# Altium PCB PCB1.PcbDoc
Units mm, origin at the board's own origin, x right, y up, seen from the top; angles counter-clockwise.
Board outline 152.4 x 101.6 mm, 2 copper layers (Top Layer, Bottom Layer); 22 components, 41 nets, 135 pads, 0 vias.
Unrouted connection lines stored in the file: 76.
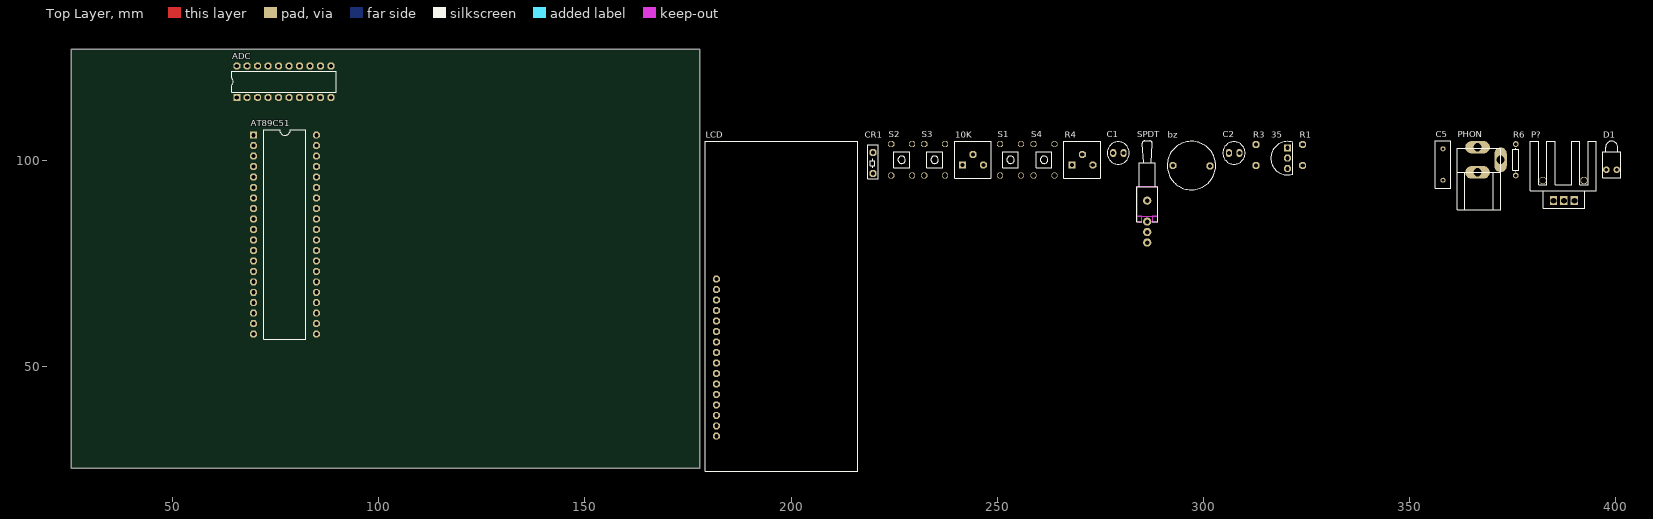
[diagram p0: Top Layer view]
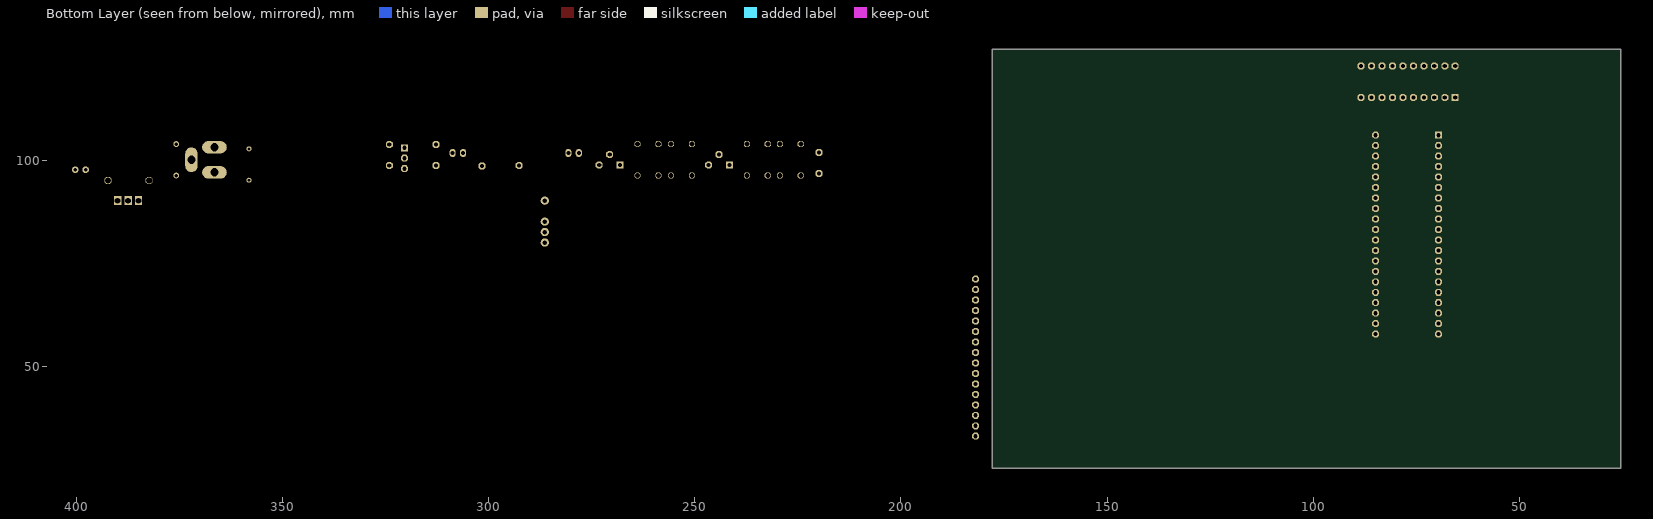
[diagram p1: Bottom Layer view, seen from below]

## Layer stack, top to bottom
Top Layer: signal copper 0.0356
Dielectric: dielectric 0.32, FR-4, Dk 4.8
Bottom Layer: signal copper 0.0356

## Board outline
25.4,25.4 177.8,25.4 177.8,127 25.4,127

## Design rules (kind name [scope] priority, off if disabled: settings)
Clearance [All] p1: gap=0.254
PolygonConnect [All] p1: connectstyle=Relief reliefconductorwidth=0.254 reliefentries=4 polygonreliefangle="90 Angle"
RoutingVias [All] p1: holewidth=0.711 width=1.27 viastyle="Through Hole" minholewidth=0.711 minwidth=1.27 maxholewidth=0.711 maxwidth=1.27
SilkscreenOverComponentPads [All] p1: minsilkscreentomaskgap=0.254
SolderMaskExpansion [All] p1: expansion=0.102
Width [All] p1: maxlimit=1 minlimit=1 preferedwidth=1
27 further rules are at their usual default settings.

## Components (designator, comment, footprint, x,y, rotation, side; value= is the part's Value field where it differs from the comment)
10K "R5" reg-variable 244.094,101.473 r0 top
35 "LM35- TEMP. SENSOR" "LM35_TEMP SENSOR" 320.421,103.124 r0 top
ADC "dip-20pin" dip-20pin 65.532,115.316 r90 top
AT89C51 "AT89S52" AT89S52 69.596,106.172 r0 top
bz "buzzer" buzzer 292.608,98.806 r0 top
C1 "Cap" CAP 278.13,101.854 r0 top
C2 "Cap" CAP 306.197,101.854 r0 top
C5 "Cap" RAD-0.3 358.14,99.06 r90 top
CR1 "XTAL-LARGE" XTAL-LARGE 219.837,96.901 r90 top
D1 "LED1" LED-1 399.034,97.79 r90 top
LCD "LCD-16X2" LCD-16x2 181.864,33.147 r90 top
P? "Voltage Regulator" "7805 WITH HEAT-SINK" 384.937,90.297 r0 top
PHON "PHONE JACK" "PHONE JACK" 361.569,88.011 r90 top
R1 "10K" "res- 2.54x3" 324.104,98.806 r90 top
R3 "10K" "res- 2.54x3" 312.801,98.806 r90 top
R4 "10K" reg-variable 270.637,101.473 r0 top
R6 "Res1" AXIAL-0.3 375.793,100.203 r90 top
S1 "SW-PB" sw-pb 250.698,104.013 r0 top
S2 "SW-PB" sw-pb 224.282,104.013 r0 top
S3 "SW-PB" sw-pb 232.283,104.013 r0 top
S4 "SW-PB" sw-pb 258.826,104.013 r0 top
SPDT "SW-SPDT" TL36WW15050 286.385,85.217 r90 top

## Footprints (in the part's own frame and the unit in brackets; to place one, negate y for a bottom-side part, rotate by r counter-clockwise, add the part's x,y. Pads: shape width x height; smd on the part's side, far side on the other; paste and mask are expansions set on the pad)
"7805 WITH HEAT-SINK" [mm]
  oct 1.7x1.7 hole 1.5: 0(-2.587,4.873) 0(7.413,4.873)
  rect 1.8x2.2 hole 1.4: 1(0,0) 2(2.54,0) 3(5.08,0)
  silkscreen extent -5.59,-1.91 10.41,14.37, body extent -5.59,-2.03 10.41,14.35, height 20.5
AT89S52 [mm]
  rect 1.7x1.7 hole 1: 1(0,0)
  oct 1.7x1.7 hole 1: 2(0,-2.54) 3(0,-5.08) 4(0,-7.62) 5(0,-10.16) 6(0,-12.7) 7(0,-15.24) 8(0,-17.78) 9(0,-20.32) 10(0,-22.86) 11(0,-25.4) 12(0,-27.94) 13(0,-30.48) 14(0,-33.02) 15(0,-35.56) 16(0,-38.1) 17(0,-40.64) 18(0,-43.18) 19(0,-45.72) 20(0,-48.26) 21(15.24,-48.26) 22(15.24,-45.72) 23(15.24,-43.18) 24(15.24,-40.64) 25(15.24,-38.1) 26(15.24,-35.56) 27(15.24,-33.02) 28(15.24,-30.48) 29(15.24,-27.94) 30(15.24,-25.4) 31(15.24,-22.86) 32(15.24,-20.32) 33(15.24,-17.78) 34(15.24,-15.24) 35(15.24,-12.7) 36(15.24,-10.16) 37(15.24,-7.62) 38(15.24,-5.08) 39(15.24,-2.54) 40(15.24,0)
  silkscreen extent 2.54,-49.53 12.7,1.27, body extent -0.76,-49.53 15.73,1.32, height 3
AXIAL-0.3 [mm] "Axial Device, Thru-Hole; 2 Leads; 0.3 in Pin Spacing"
  round 1.4 hole 0.85: 1(-3.81,0) 2(3.81,0)
  silkscreen extent -2.77,-0.76 2.77,0.76
buzzer [mm]
  oct 1.7x1.7 hole 1: 1(0,0) 2(9,-0.127)
  silkscreen extent -1.37,-5.87 10.38,5.87, body extent -1.27,-5.84 10.42,5.87, height 5
CAP [mm]
  oval 1.5x2 hole 1: 1(0,0) 2(2.54,0)
  silkscreen extent -1.46,-2.7 3.94,2.7, body extent -1.75,-3.04 4.32,3.04, height 7.01
dip-20pin [mm]
  rect 1.7x1.7 hole 1: 1(0,0)
  oct 1.7x1.7 hole 1: 2(0,-2.54) 3(0,-5.08) 4(0,-7.62) 5(0,-10.16) 6(0,-12.7) 7(0,-15.24) 8(0,-17.78) 9(0,-20.32) 10(0,-22.86) 11(7.62,-22.86) 12(7.62,-20.32) 13(7.62,-17.78) 14(7.62,-15.24) 15(7.62,-12.7) 16(7.62,-10.16) 17(7.62,-7.62) 18(7.62,-5.08) 19(7.62,-2.54) 20(7.62,0)
  silkscreen extent 1.27,-24.13 6.35,1.27, body extent -0.13,-24.13 7.87,1.27, height 2.51
LCD-16x2 [mm]
  oct 1.7x1.7 hole 1: 1(0,0) 2(2.54,0) 3(5.08,0) 4(7.62,0) 5(10.16,0) 6(12.7,0) 7(15.24,0) 8(17.78,0) 9(20.32,0) 10(22.86,0) 11(25.4,0) 12(27.94,0) 13(30.48,0) 14(33.02,0) 15(35.56,0) 16(38.1,0)
  round 1.524 hole 2.5: no(-6,0.15) no(-6,-31.85) no(69,-31.85) no(69,0.15)
  silkscreen extent -8.51,-34.35 71.5,2.65, body extent -8.38,-34.04 71.37,2.67, height 21.6
LED-1 [mm] "Typical RED GaAs LED; 2 Leads"
  round 1.6 hole 0.8: 1(0,1.27) 2(0,-1.27)
  silkscreen extent -2,-2.2 6.95,2.2
"LM35_TEMP SENSOR" [mm]
  rect 1.7x1.7 hole 1: 1(0,0)
  oct 1.7x1.7 hole 1: 2(0,-2.54) 3(0,-5.08)
  silkscreen extent -4.06,-6.6 1.32,1.52, body extent -4.11,-6.65 1.3,1.57, height 7
"PHONE JACK" [mm]
  oval 3x6 hole 2: 1(9.144,-4.953) 2(15.24,-4.953)
  oval 6x3 hole 2: 3(12.192,-10.541)
  silkscreen extent 0.04,-10.53 15.04,-0.03, body extent -0.03,-10.67 16.78,0, height 8.97
RAD-0.3 [mm] "Radial Cap, Thru-Hole; 2 Leads; 0.3 in Pin Spacing"
  round 1.2 hole 0.7: 1(-3.81,0) 2(3.81,0)
  silkscreen extent -5.71,-1.91 5.71,1.91
reg-variable [mm]
  rect 1.7x1.7 hole 1: 1(-2.54,-2.54)
  oct 1.7x1.7 hole 1: 2(0,0) 3(2.54,-2.54)
  silkscreen extent -4.44,-5.71 4.44,3.17, body extent -4.44,-5.71 4.44,3.17, height 5.1
"res- 2.54x3" [mm]
  oct 1.7x1.7 hole 1: 1(0,0) 2(5.08,0)
  body extent -0.51,-0.98 5.57,1.02, height 3
sw-pb [mm]
  oct 1.5x1.5 hole 1.2: 1(0,-7.62) 1(0,0) 2(5.08,-7.62) 2(5.08,0)
  silkscreen extent 0.64,-5.71 4.44,-1.91, body extent -0.76,-8.38 5.84,0.76, height 5.5
TL36WW15050 [mm] "SPDT Subminiature Toggle Switch, Right Angle Mounting, Vertical Actuation"
  round 2 hole 1.1: 1(0,0) 2(-2.54,0) 3(-5.08,0) M(5.08,0)
  Top Layer keep-out region: 0,-1.27 0,-2.54 1.27,-2.54 1.27,-1.27
  Top Layer keep-out region: 0,2.54 0,1.27 1.27,1.27 1.27,2.54
  Top Layer keep-out region: 1.27,2.54 1.27,-2.54 8.509,-2.54 8.509,2.54
  silkscreen extent 0,-2.54 19.56,2.54
XTAL-LARGE [mm]
  oct 1.7x1.7 hole 1: 1(0,0) 2(5.08,0)
  silkscreen extent -1.27,-1.27 6.98,1.27, body extent -2.07,-2.25 7.87,2.19, height 13.15

## Part data
10K R4: library part "Variable Resistor"
C1 C2 C5: "Capacitor"
CR1: "Crystal Oscillator"
D1: "Typical RED GaAs LED"
P?: library part "7805 WITH HEATSINK"
R1 R3: library part "Resistor 2.54x3"
R6: "Resistor"
S1 S2 S3 S4: "Switch"
SPDT: "SPDT Subminiature Toggle Switch, Right Angle Mounting, Vertical Actuation"

## Nets (pads, with @x,y where several pads share a name; then routed paths per layer and width w, separated by ;. In a path a pad name is that pad's centre, name@x,y a point inside that pad or via, vN(x,y) a via of type N, cw(c..) or ccw(c..) an arc to the next point about the centre after c; other vN are vias at no path point)
1: C5.2 P?.1 PHON.1
2: 10K.1 LCD.2
3: 10K.2 LCD.3
"CN 1": ADC.18 AT89C51.39
"CN 2": ADC.17 AT89C51.38
"CN 3": ADC.16 AT89C51.37
"CN 4": ADC.15 AT89C51.36
"CN 5": ADC.14 AT89C51.35
"CN 6": ADC.13 AT89C51.34
"CN 7": ADC.12 AT89C51.33
"CN 8": ADC.11 AT89C51.32
"CN 9": ADC.3 AT89C51.13
"CN 10": ADC.2 AT89C51.14
"CN 11": ADC.5 AT89C51.15
"CN 12": ADC.19 R3.1
"CN 13": 35.2 ADC.6
"CN 14": ADC.9 R4.2
"CN 15": AT89C51.1 S1.2
"CN 16": AT89C51.2 S2.2
"CN 17": AT89C51.4 S3.2
"CN 18": AT89C51.5 S4.2
"CN 19": AT89C51.3 SPDT.2
"CN 20": AT89C51.8
"CN 21": AT89C51.9 C1.1 R1.1
E: AT89C51.16
GND: 10K.3 35.1 ADC.1 ADC.7 ADC.8 ADC.10 AT89C51.20 bz.1 C2.1 C5.1 D1.2 LCD.15 P?.2 PHON.2 R1.2 R4.3 S1.1 S2.1 S3.1 S4.1 SPDT.3
NetADC_4: ADC.4 C2.2 R3.2
NetAT89C51_18: AT89C51.18 CR1.1
NetAT89C51_19: AT89C51.19 CR1.2
NetAT89C51_21: AT89C51.21 LCD.7
NetAT89C51_22: AT89C51.22 LCD.8
NetAT89C51_23: AT89C51.23 LCD.9
NetAT89C51_24: AT89C51.24 LCD.10
NetAT89C51_25: AT89C51.25 LCD.11
NetAT89C51_26: AT89C51.26 LCD.12
NetAT89C51_27: AT89C51.27 LCD.13
NetAT89C51_28: AT89C51.28 LCD.14
NetD1_1: D1.1 R6.2
RS: AT89C51.10
RW: AT89C51.11
VCC: 35.3 ADC.20 AT89C51.31 AT89C51.40 bz.2 C1.2 LCD.16 P?.3 R4.1 R6.1 SPDT.1
pads on no net: AT89C51.6 AT89C51.7 AT89C51.12 AT89C51.17 AT89C51.29 AT89C51.30 LCD.1 LCD.4 LCD.5 LCD.6 LCD.no P?.0 PHON.3 SPDT.M